# Altium PCB Firing Angle.PcbDoc
Units mil, origin at the board's own origin, x right, y up, seen from the top; angles counter-clockwise.
Board outline 2020 x 2420 mil, 2 copper layers (Top Layer, Bottom Layer); 25 components, 18 nets, 70 pads, 0 vias.
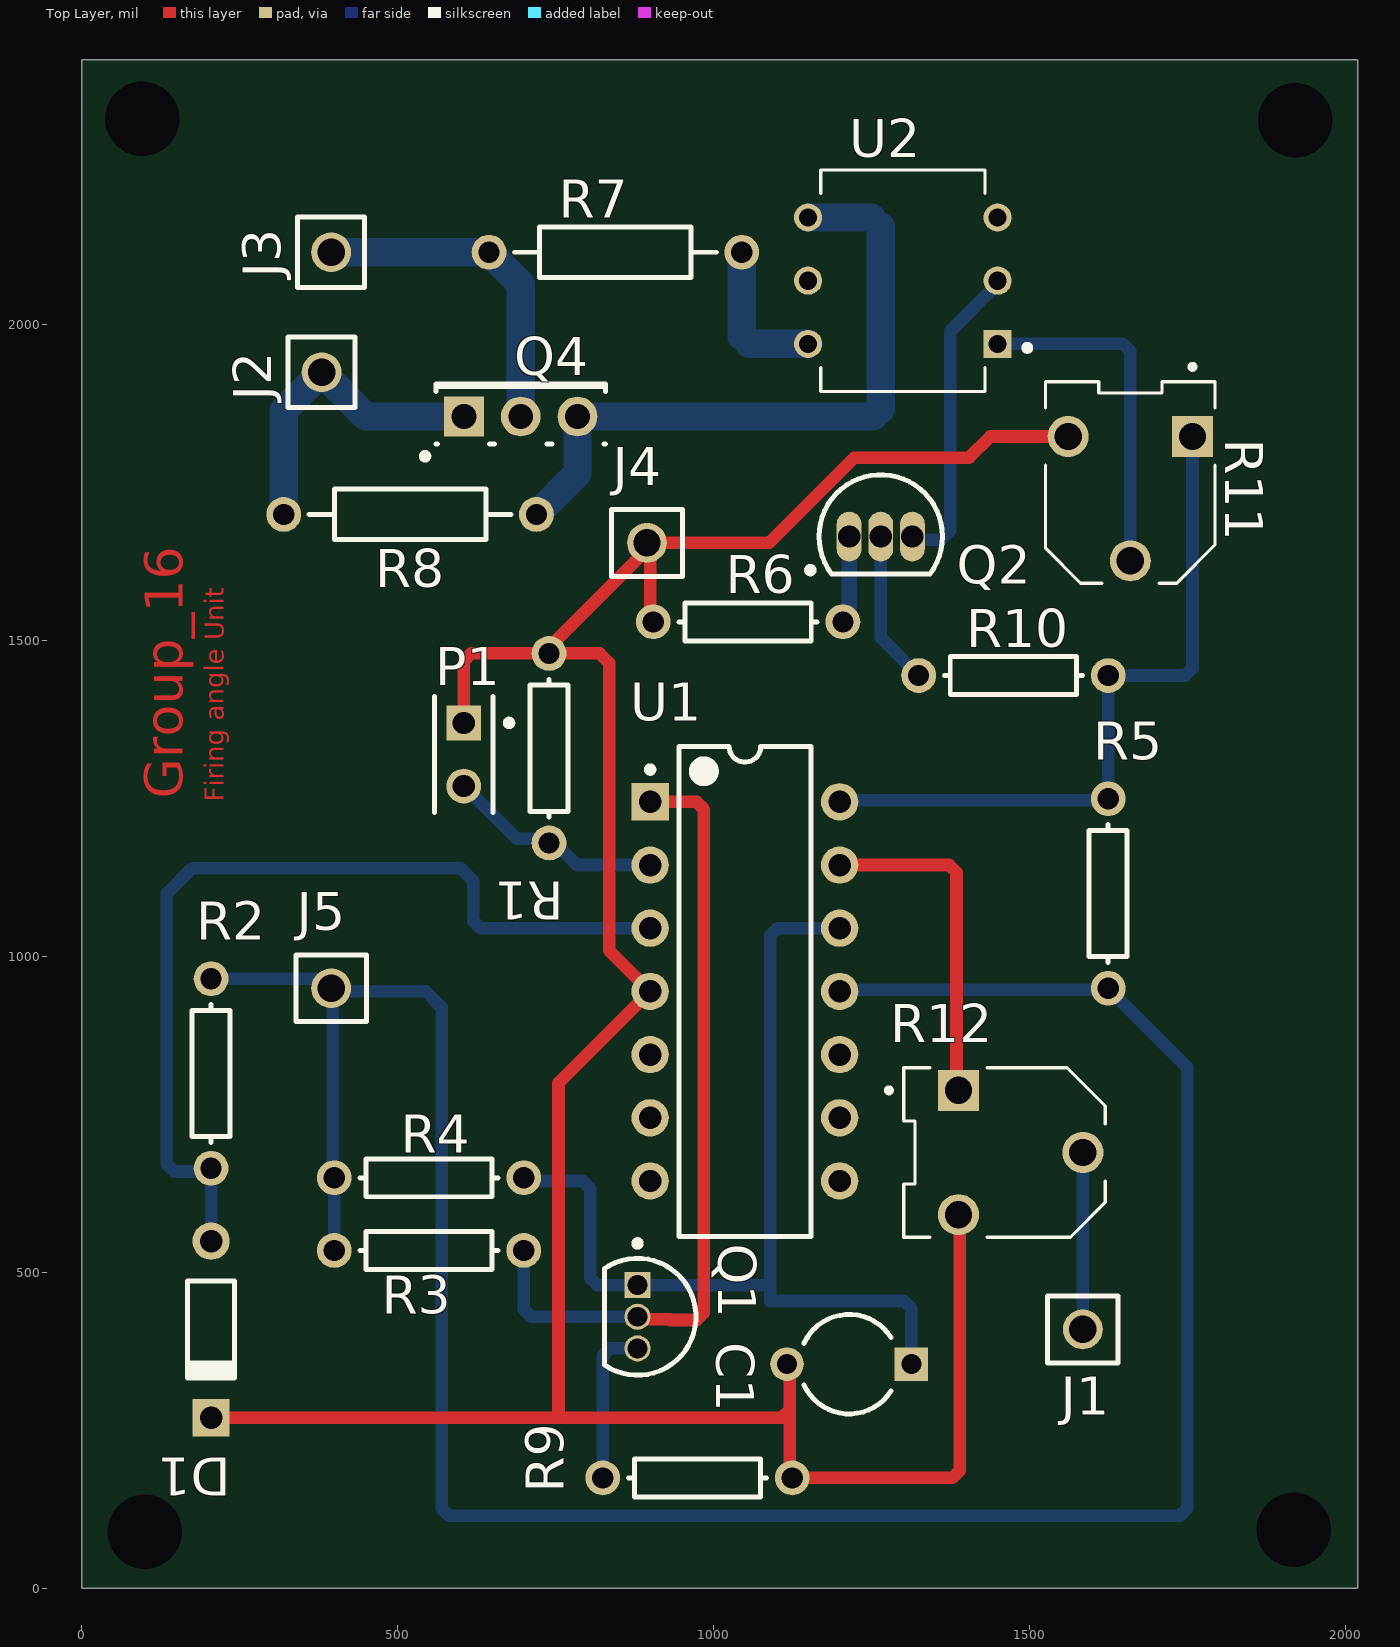
[diagram p0: Top Layer view]
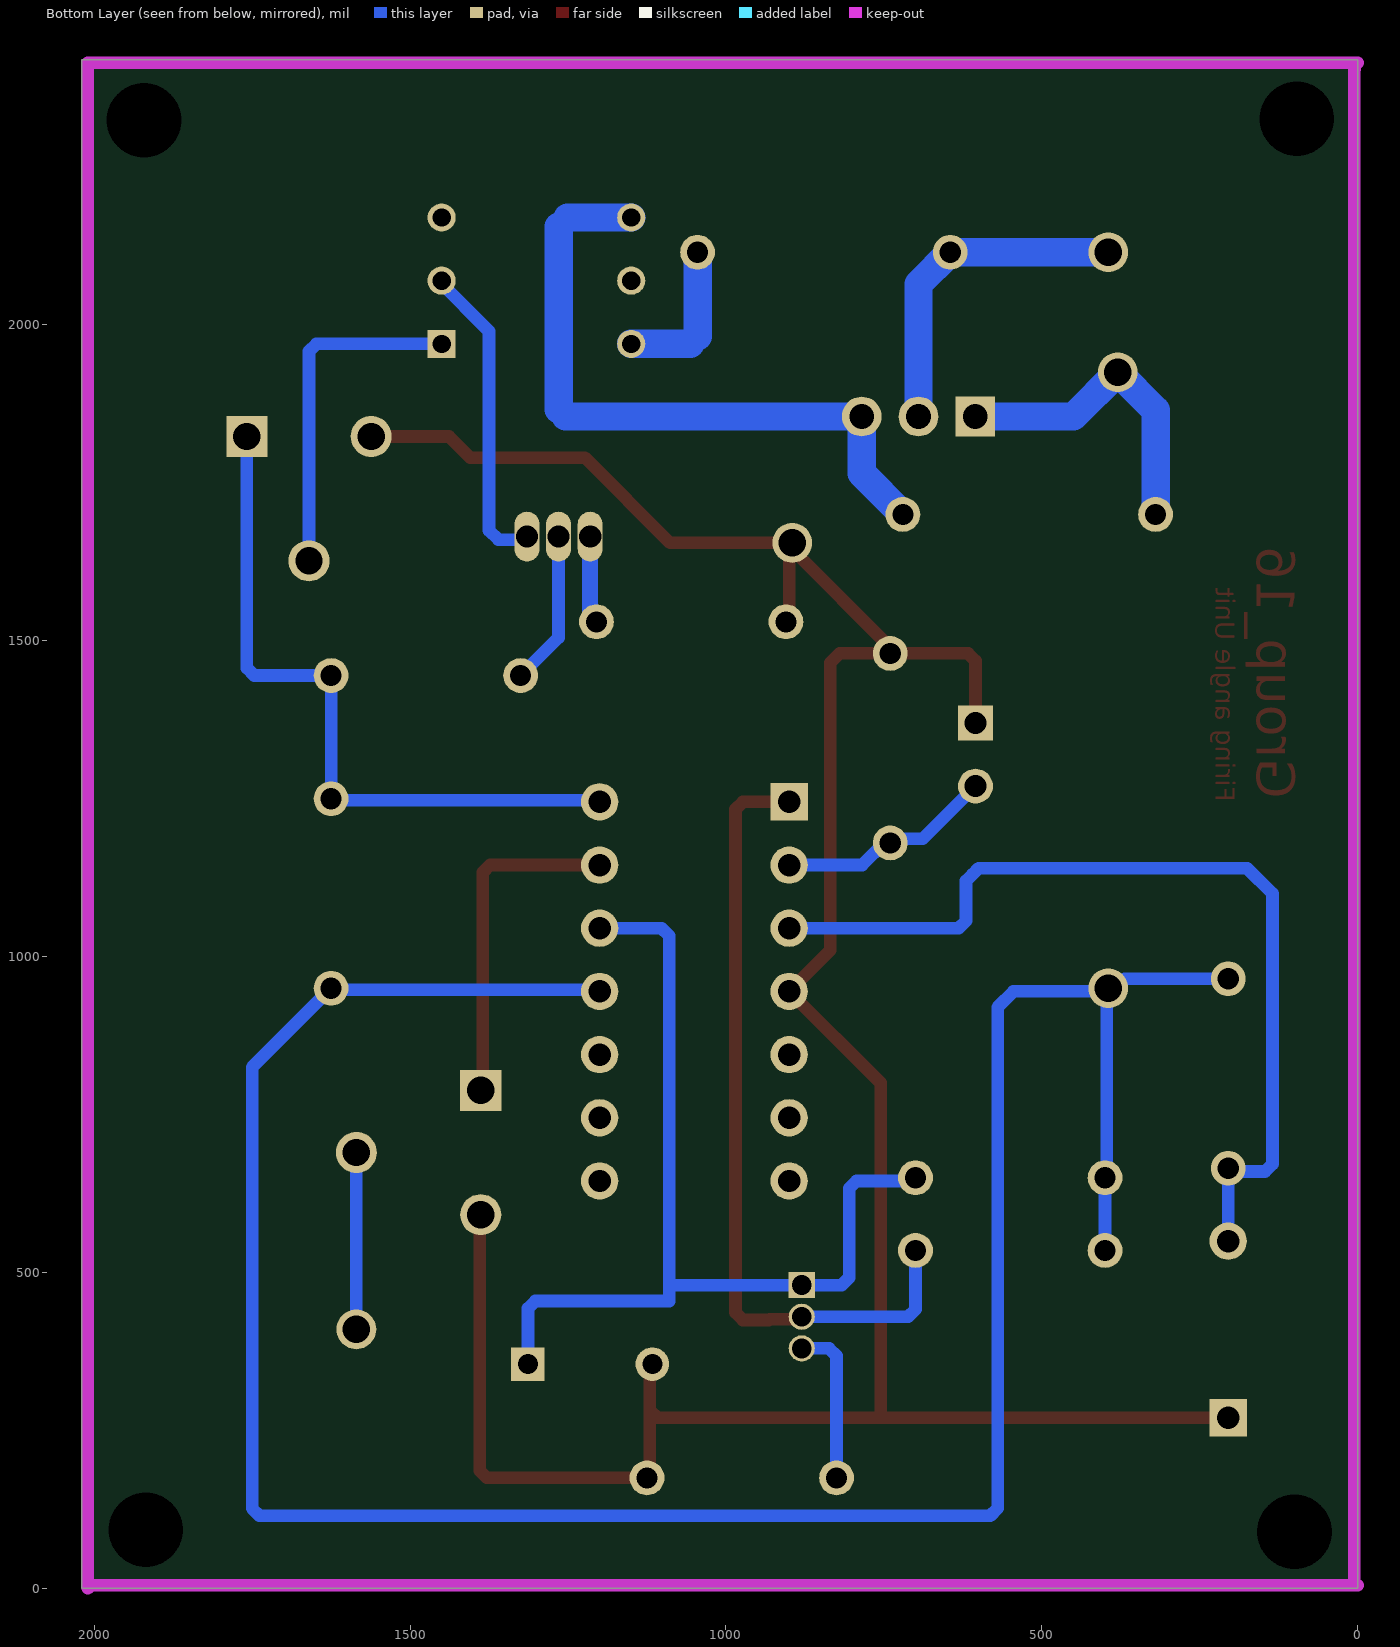
[diagram p1: Bottom Layer view, seen from below]

## Layer stack, top to bottom
Top Solder: solder mask 0.4, Solder Resist, Dk 3.5
Top Layer: signal copper 1.4
Dielectric 1: dielectric 12.6, FR-4, Dk 4.8
Bottom Layer: signal copper 1.4
Bottom Solder: solder mask 0.4, Solder Resist, Dk 3.5

## Board outline
0,0 2020,0 2020,2420 0,2420

## Design rules (kind name [scope] priority, off if disabled: settings)
Clearance [All] p1: gap=10 ignorepadtopadclearanceinfootprint=FALSE except(0: Arc-Hole Track-Hole SMDPad-Hole THPad-Hole Via-Hole Fill-Hole Poly-Hole Region-Hole Text-Hole)
PolygonConnect [All] p1: connectstyle=Relief reliefconductorwidth=10 reliefentries=4 polygonreliefangle="90 Angle" airgapwidth=10
RoutingVias [All] p1: holewidth=28 width=50 viastyle="Through Hole" minholewidth=28 minwidth=50 maxholewidth=28 maxwidth=50
SolderMaskExpansion [All] p1: expansion=4 istentingtop=FALSE
Width [All] p1: maxlimit=45 minlimit=20 preferedwidth=20 toplayer_maxwidth=20 minimp=50.000000 maximp=50.000000 favimp=50.000000
30 further rules are at their usual default settings.

## Components (designator, comment, footprint, x,y, rotation, side; value= is the part's Value field where it differs from the comment)
C1 "Cap2" CAPR5-4X5 1215,355 r180 top value=2.2nF
D1 "Diode 1N914" DO-35 205,410 r270 top
J1 "61300111121" 61300111121 1585,410 r180 top
J2 "" 61300111121 380,1925 r90 top
J3 "61300111121" 61300111121 395,2115 r90 top
J4 "61300111121" 61300111121 895,1655 r0 top
J5 "61300111121" 61300111121 395,950 r0 top
P1 "5-146280-2" TECO-5-146280-2_V 605,1320 r270 top
Q1 "BC547B" ONSC-TO-92-3-29-11 880,430 r270 top
Q2 "BC108" TO-92A 1265,1665 r270 top
Q4 "Triac" 369-03 695.24,1855 r0 top
R1 "Res1" AXIAL-0.3 740,1330 r270 top value=1K
R2 "Res1" AXIAL-0.3 205,815 r90 top value=1K
R3 "Res1" AXIAL-0.3 550,535 r180 top value=1K
R4 "Res1" AXIAL-0.3 550,650 r180 top value=3.3K
R5 "Res1" AXIAL-0.3 1625,1100 r90 top value=1K
R6 "Res1" AXIAL-0.3 1475,1445 r180 top value=1K
R7 "Res2" AXIAL-0.4 845,2115 r180 top value=0.1K
R8 "Res2" AXIAL-0.4 520,1700 r180 top value=1K
R9 "Res1" AXIAL-0.3 975,175 r180 top value=1K
R10 "Res1" AXIAL-0.3 1055,1530 r0 top value=1K
R11 "3306F-1-105" TRIM_3306F-1-105 1660,1725 r270 top
R12 "3306F-1-105" TRIM_3306F-1-105 1486.57,690 r0 top
U1 "LM324NG" ONSC-PDIP-14-646-06 1050,945 r0 top
U2 "MOC3021" DIP762W45P254L889H508Q6 1300,2070 r180 top

## Footprints (in the part's own frame and the unit in brackets; to place one, negate y for a bottom-side part, rotate by r counter-clockwise, add the part's x,y. Pads: shape width x height; smd on the part's side, far side on the other; paste and mask are expansions set on the pad)
369-03 [mm] "TO, Thru-Hole, Vertical, Heatsink Mounted; 3 In-Line Leads; Pitch 2.28 mm"
  rect 1.6x1.6 hole 1: 1(-2.28,0)
  round 1.6 hole 1: 2(0,0) 3(2.28,0)
  silkscreen extent -3.97,-1.72 3.4,1.3, body extent -3.45,-1.15 3.45,1.35, height 9.7
61300111121 [mm] "Pin Header, pitch 2.54 mm, THT, Vertical, single row, 1p"
  round 1.6 hole 1.1: 1(0,0)
  silkscreen extent -1.42,-1.35 1.42,1.35, body extent -1.27,-1.27 1.27,1.27, height 8.57
AXIAL-0.3 [mm] "Axial Device, Thru-Hole; 2 Leads; 0.3 in Pin Spacing"
  round 1.4 hole 0.85: 1(-3.81,0) 2(3.81,0)
  silkscreen extent -2.77,-0.76 2.77,0.76
AXIAL-0.4 [mm] "Axial Device, Thru-Hole; 2 Leads; 0.4 in Pin Spacing"
  round 1.4 hole 0.85: 1(-5.08,0) 2(5.08,0)
  silkscreen extent -4.06,-1.02 4.06,1.02
CAPR5-4X5 [mm] "Capacitor; 2 Leads"
  rect 1.35x1.35 hole 0.8: 1(-2.5,0)
  round 1.35 hole 0.8: 2(2.5,0)
  silkscreen extent -1.69,-2 1.82,2
DIP762W45P254L889H508Q6 [mm]
  rect 1.13x1.13 hole 0.73: 1(-3.81,2.54)
  round 1.13 hole 0.73: 2(-3.81,0) 3(-3.81,-2.54) 4(3.81,-2.54) 5(3.81,0) 6(3.81,2.54)
  silkscreen extent -5.12,-4.45 3.3,4.45
DO-35 [mm] "Diode, Axial; Body 3.8 x 1.9 mm (LxDia. max), Lead Dia. 0.53 mm (max)"
  round 1.5 hole 0.9: 1(-3.55,0)
  rect 1.5x1.5 hole 0.9: 2(3.55,0)
  silkscreen extent -1.95,-0.95 2.05,0.95
ONSC-PDIP-14-646-06 [mm] "DIP, 14-Leads, Body 19.7x7.1mm, Pitch 2.54mm"
  rect 1.5x1.5 hole 0.9: 1(-3.81,7.62)
  round 1.5 hole 0.9: 2(-3.81,5.08) 3(-3.81,2.54) 4(-3.81,0) 5(-3.81,-2.54) 6(-3.81,-5.08) 7(-3.81,-7.62) 8(3.81,-7.62) 9(3.81,-5.08) 10(3.81,-2.54) 11(3.81,0) 12(3.81,2.54) 13(3.81,5.08) 14(3.81,7.62)
  silkscreen extent -3.93,-9.85 2.65,9.85, body extent -3.95,-9.85 3.95,9.85, height 5.33
ONSC-TO-92-3-29-11 [mm] "TO, 3-Leads, Body Dia 4.7mm, Pitch 1.27mm"
  rect 1.05x1.05 hole 0.8: 1(-1.27,0)
  round 1.05 hole 0.8: 2(0,0) 3(1.27,0)
  silkscreen extent -3.07,-1.34 2.35,2.35, body extent -2.35,-1.33 2.36,2.36, height 7.87
TECO-5-146280-2_V [mm] "Connector, 2-Leads, Body 4.67x2.34mm, Pitch 2.54mm"
  rect 1.4x1.4 hole 0.89: 1(-1.27,0)
  round 1.4 hole 0.89: 2(1.27,0)
  silkscreen extent -2.33,-1.17 2.33,1.94, body extent -2.34,-1.17 2.34,1.17, height 5.33
TO-92A [mm] "TO, Flat Index; 3 In-Line, Axial Leads; Body Dia. 4.5mm; Leads 0.51 x 0.48 mm (max)"
  oval 2x1 hole 0.9: 1(0,-1.27) 2(0,0) 3(0,1.27)
  silkscreen extent -2.48,-2.95 1.5,2.48, body extent -2.48,-2.5 1.5,2.5, height 6.86
TRIM_3306F-1-105 [mm]
  rect 1.65x1.65 hole 1.1: 1(-2.5,2.5)
  round 1.65 hole 1.1: 2(2.5,0) 3(-2.5,-2.5)
  silkscreen extent -5.4,-3.4 3.4,3.4, body extent -4.7,-3.4 3.4,3.4, height 8.38

## Part data
C1: "Capacitor", PackageDescription="Capacitor; 2 Leads", PackageReference=CAPR5-4X5, Published=23-Sep-2002, Publisher="Altium Limited"
D1: "High Conductance Fast Diode", Code_JEDEC=DO-204-AH, ComponentLink1Description="Manufacturer Link", ComponentLink1URL=http://www.fairchildsemi.com/, ComponentLink2Description=Datasheet, ComponentLink2URL=http://www.fairchildsemi.com/ds/1N%2F1N4448.pdf, DatasheetVersion=1997, LatestRevisionDate=17-Jul-2002, LatestRevisionNote="Re-released for DXP Platform.", PackageDescription="Diode, Axial; Body 3.8 x 1.9 mm (LxDia. max), Lead Dia. 0.53 mm (max)", PackageReference=DO-35, Published=8-Jun-2000, Publisher="Altium Limited"
J1 J3 J4 J5: library part CMP-1502-01058-1, "THT Vertical Pin Header WR-PHD, Pitch 2.54 mm, Single Row, 1 pins", Contact Resistance=20mOhm, Manufacturer="Wurth Elektronik", Operating Temperature=-40to105degC, Rated Current=3A, Withstanding Voltage=500VAC, Working Voltage=250VAC, Datasheet URL=https://katalog.we-online.de/em/datasheet/6130xx11121.pdf, Gender=Male, Manufacturer URL=http://www.we-online.de, Mounting Technology=THT, Orientation=Vertical, Package Reference=61300111121, Packaging=Bag, Part Number=61300111121, Pin Number=1, Pitch=2.54mm, Publisher=WurthElektronik, Row Number=Single
J2: library part CMP-1502-01058-1, "THT Vertical Pin Header WR-PHD, Pitch 2.54 mm, Single Row, 1 pins", Contact Resistance=20mOhm, Manufacturer="Wurth Elektronik", Operating Temperature=-40to105degC, Package Reference=61300111121, Rated Current=3A, Withstanding Voltage=500VAC, Working Voltage=250VAC, Datasheet URL=https://katalog.we-online.de/em/datasheet/6130xx11121.pdf, Gender=Male, Manufacturer URL=http://www.we-online.de, Mounting Technology=THT, Orientation=Vertical, Packaging=Bag, Part Number=61300111121, Pin Number=1, Pitch=2.54mm, Publisher=WurthElektronik, Row Number=Single
P1: library part CMP-2000-07492-1, "Male Header, Pitch 2.54 mm, 1 x 2 Position, Height 8.21 mm, Tail Length 3.05 mm, -65 to 105 degC, RoHS, Bulk", Case\/Package=100, Colour=Black, Current Rating=3A, Flammability Rating=UL94V-0, High Temperature Housing=Yes, Manufacturer="TE Connectivity", Max Current Rating=5A, Max Operating Temperature=105degC, Min Operating Temperature=-65degC, Package Description="Male Header, Pitch 2.54 mm, 1 x 2 Position, Height 8.21 mm, Tail Length 3.05 mm", Package Quantity=500, Approvals=CSA, Board Standoff=No(Without), Connector Type=Header, Contact Gender=Male, Contact Material=CopperAlloy, Contact Mating Length=0.23inch, Contact Plating=Matte, Contact Protection=No(Without), Contact Shape=Square, Datasheet URL=http://www.te.com/commerce/DocumentDelivery/DDEController?Action=showdoc&DocId=Customer+Drawing%7F146280%7FH1%7Fpdf%7FEnglish%7FENG_CD_146280_H1.pdf%7F5-146280-2, Datasheet Version="Rev. H1, 08/2016", Depth=2.34mm, Gasket=No(Without), High Speed Serial Data Connector=No, Housing Colour=Black, Housing Material=Polymer, Keyed=No, Length=4.67mm, Manufacturer URL=http://www.te.com/, Mating Alignment=No(Without), Mating Connector Lock=No(Without), Mating Post Length=0.23inch, Mount=ThroughHole, Mounting Technology=ThroughHole, Number of Contacts=2, Number of Positions=2, Number of Rows=1, Orientation=Straight, Package Reference=5-146280-2, Packaging=Carton, Panel Mount Retention=No(Without), PCB Mount Retention=Without, PCB Mounting Orientation=Vertical, PCB Thickness=0.063inch, Pitch=2.54mm, Radiation Hardening=No, RoHSCompliant=true, Row Spacing=2.54mm, Selectively Loaded=No(Without), Stabilizers=No(Without), Termination=ThroughHole, Termination Post Length=0.12inch
Q1: library part CMP-1048-01467-1, "Amplifier Transistor, NPN Silicon, 3-Pin TO-92, Bulk Box", Manufacturer="On Semiconductor", ComponentLink1Description="Manufacturer URL", ComponentLink1URL=http://www.onsemi.com/, ComponentLink2Description=Datasheet, ComponentLink2URL=http://www.onsemi.com/pub_link/Collateral/BC546-D.PDF, ComponentLink3Description="Package Specification", ComponentLink3URL=http://www.onsemi.cn/pub_link/Collateral/2N6426-D.PDF, DatasheetVersion="Rev. 7", fT Min (MHz)=150, IC Continuous (A)=0.1, Mounting Technology="Through Hole", PackageDescription="3-Pin Transistor Outline, Body 4.825 x 3.685 mm, Pitch 1.27 mm", PackageReference=TO-92-3-29-11_AM_SL, PackageVersion="Rev. AM", Packing="Bulk Box", PartNumber=BC547B, Polarity=NPN, RoHS=FALSE
Q2: library part 2N3904, "NPN General Purpose Amplifier", ComponentLink1Description="Manufacturer Link", ComponentLink1URL=http://www.fairchildsemi.com/, ComponentLink2Description=Datasheet, ComponentLink2URL=http://www.fairchildsemi.com/ds/2N%2F2N3904.pdf, DatasheetVersion=1997, LatestRevisionDate=15-Jan-2003, LatestRevisionNote="PCB Footprint 'BCY-W3/D4.7' replaced", PackageDescription="TO, Flat Index; 3 In-Line, Axial Leads; Body Dia. 4.5mm; Leads 0.51 x 0.48 mm (max)", PackageReference=TO-92A, PackageVersion=Sep-1998, Published=8-Jun-2000, Publisher="Altium Limited"
Q4: "Silicon Bidirectional Triode Thyristor", ComponentLink1Description="Manufacturer Link", ComponentLink1URL=http://www.motorola.com/, DatasheetVersion=1999, LatestRevisionDate=17-Jul-2002, LatestRevisionNote="Re-released for DXP Platform.", Note="Pin 2 is electrically connected to Pin 4 (TAB)", PackageDescription="TO, Thru-Hole, Vertical, Heatsink Mounted; 3 In-Line Leads; Pitch 2.28 mm", PackageReference=369-03, Published=29-Sep-2000, Publisher="Altium Limited"
R1 R2 R3 R4 R5 R6 R7 R8 R9 R10: "Resistor", LatestRevisionDate=17-Jul-2002, LatestRevisionNote="Re-released for DXP Platform.", Published=8-Jun-2000, Publisher="Altium Limited"
  R1 R2 R3 R4 R5 R6 R9 R10: PackageDescription="Axial Device, Thru-Hole; 2 Leads; 0.3 in Pin Spacing", PackageReference=AXIAL-0.3
  R7 R8: PackageDescription="Axial Device, Thru-Hole; 2 Leads; 0.4 in Pin Spacing", PackageReference=AXIAL-0.4
R11 R12: "1 MOhms 0.2W, 1/5W PC Pins Through Hole Trimmer Potentiometer Cermet 1 Turn Top Adjustment", Package="3306F Bourns", Availability=Good, Check_prices=https://www.snapeda.com/parts/3306F-1-105/Bourns%20-%20J.W.%20Miller/view-part/862876/?ref=eda, MF=Bourns, MP=3306F-1-105, Price=None, Purchase-URL=https://pricing.snapeda.com/search/part/3306F-1-105/?ref=eda, SnapEDA_Link=https://www.snapeda.com/parts/3306F-1-105/Bourns%20-%20J.W.%20Miller/view-part/862876/?ref=snap
U1: library part CMP-1310-00027-1, "Single Supply Quad Operational Amplifier, 3 to 32 V, 0 to 70 degC, 14-Pin PDIP, Pb-Free, Tube", Manufacturer="On Semiconductor", ComponentLink1Description="Manufacturer URL", ComponentLink1URL=http://www.onsemi.com/, ComponentLink2Description=Datasheet, ComponentLink2URL=http://www.onsemi.cn/pub_link/Collateral/LM324-D.PDF, ComponentLink3Description="Package Specification", ComponentLink3URL=http://www.onsemi.com/pub_link/Collateral/646-06.PDF, DatasheetVersion="Rev. 25", Mounting Technology="Through Hole", PackageDescription="14-Pin Plastic Dual-In Line Package, Body 19.18 x 6.605 mm, Pitch 2.54 mm", PackageReference=PDIP-14-646-06, PackageVersion="Rev. R, 06/2013", Packing=Tube, PartNumber=LM324NG, RoHS=TRUE, VCC Max (V)=32, VCC Min (V)=3
U2: "Optoisolator Triac Output 5000Vrms 1 Channel 6-DIP", Package="DIP-6 Lite-On", Availability=Unavailable, MF=Lite-On, MP=MOC3021, Price=None, SnapEDA_Link=https://www.snapeda.com/parts/MOC3021/Lite-On/view-part/4551083/?ref=snap

## Free pads (board coordinates)
  round 60 hole 118.11: 6(96.3,2326.58) 6(100,90) 6(1918.7,92.9) 6(1921.09,2324.09)

## Nets (pads, with @x,y where several pads share a name; then routed paths per layer and width w, separated by ;. In a path a pad name is that pad's centre, name@x,y a point inside that pad or via, vN(x,y) a via of type N, cw(c..) or ccw(c..) an arc to the next point about the centre after c; other vN are vias at no path point)
+12: J5.1 R2.2 R3.2 R4.2 R5.1 U1.11 | length 4082.3
  Bottom Layer w20: R2.2 368.37,965 383.37,950 J5.1 J5.1@397.5,947.5 ; R3.2 R4.2 397.5,652.5 J5.1@397.5,947.5 ; U1.11 1202.5,947.5 1622.5,947.5 R5.1 1750,825 1750,126.72 1738.28,115 581.72,115 570,126.72 570,920 545,945 400,945 J5.1@397.5,947.5
GND: C1.2 D1.2 J4.1 P1.1 R1.1 R9.1 R10.1 R11.3 R12.3 U1.4 | length 4516.1
  Top Layer w20: D1.2 755,270.24 ; P1.1 605,1468.28 616.72,1480 R1.1 ; R10.1 900,1535 900,1650 J4.1 ; C1.2 1120.79,350.79 1120.79,179.21 R9.1 1378.28,175 1390,186.72 1390,589.72 R12.3 ; 1120,281.95 1108.28,270.24 755,270.24 ; R11.3@1561.57,1811.92 R11.3 1438.43,1823.43 1405,1790 1223.32,1790 1088.32,1655 J4.1 ; R1.1 740,1489.5 895,1644.5 J4.1 ; R1.1 820,1480 835,1465 835,1010 U1.4 755,800 755,270.24
NetC1_1: C1.1 Q1.1 R4.1 U1.12 | length 1562.5
  Bottom Layer w20: R4.1@709.5,650 R4.1 705,645 793.28,645 805,633.28 805,491.72 816.72,480 Q1.1 1090,480 ; U1.12 1101.72,1045 1090,1033.28 1090,480 ; C1.1 1313.43,443.28 1301.71,455 1090,455 1090,480
NetD1_1: D1.1 R2.1 U1.3 | length 1478.4
  Bottom Layer w20: D1.1 R2.1 200,660 146.72,660 135,671.72 135,1100 175,1140 600,1140 609.97,1130.03 620,1120 620,1056.72 631.72,1045 U1.3
NetJ1_1: J1.1 R12.2 | length 280
  Bottom Layer w20: J1.1 R12.2
NetJ2_1: J2.1 Q4.1 R8.2 | length 504.3
  Bottom Layer w45: R8.2 320,1865 J2.1 450,1855 Q4.1
NetJ3_1: J3.1 Q4.2 R7.2 | length 531.1
  Bottom Layer w25: Q4.2@695,1855.24 Q4.2
  Bottom Layer w45: J3.1 R7.2 695.24,2064.76 Q4.2
NetP1_2: P1.2 R1.2 U1.2 | length 346.8
  Bottom Layer w20: P1.2 688.28,1186.72 733.28,1186.72 R1.2 749.5,1180 784.5,1145 U1.2
NetQ1_2: Q1.2 R3.1 U1.1 | length 1276.5
  Top Layer w20: Q1.2 883.64,426.36 930.67,426.36 932.03,425 973.28,425 985,436.72 985,1233.28 973.28,1245 U1.1
  Bottom Layer w20: R3.1 700,441.72 711.72,430 Q1.2
NetQ1_3: Q1.3 R9.2 | length 253.1
  Bottom Layer w20: R9.2 825,368.28 836.72,380 Q1.3
NetQ2_1: Q2.1 R10.2 | length 139.1
  Bottom Layer w25: R10.2 1205,1538.15 1215,1548.15 Q2.1
NetQ2_2: Q2.2 R6.2 | length 244.9
  Bottom Layer w20: Q2.2 1265,1505 R6.2
NetQ2_3: Q2.3 U2.2 | length 496.6
  Bottom Layer w20: Q2.3@1320,1660 1360.36,1660 1375,1674.64 1375,1990 U2.2@1455,2070
  Bottom Layer w25: Q2.3 Q2.3@1320,1660
NetQ4_3: Q4.3 R8.1 U2.4 | length 1076.5
  Bottom Layer w25: 1250.36,2170 1265,2155.36 ; 1253.28,1855 1265,1866.72
  Bottom Layer w45: R8.1 785,1765 Q4.3 1253.28,1855 ; U2.4 1250.36,2170 ; 1265,1866.72 1265,2155.36
NetR5_2: R5.2 R6.1 R11.1 U1.14 | length 1127.1
  Bottom Layer w20: U1.14 1202.5,1247.5 1622.5,1247.5 R5.2 R6.1 1746.71,1445 1758.43,1456.72 R11.1
NetR7_1: R7.1 U2.6 | length 243.1
  Bottom Layer w20: 1045,1981.72 1056.72,1970
  Bottom Layer w45: 1045,1981.72 R7.1 ; 1056.72,1970 U2.6
NetR11_2: R11.2 U2.1 | length 541.6
  Bottom Layer w20: U2.1@1455,1970 1648.28,1970 1660,1958.28 R11.2
NetR12_1: R12.1 U1.13 | length 536
  Top Layer w20: U1.13 1373.28,1145 1385,1133.28 1385,791.57 R12.1
pads on no net: U1.5 U1.6 U1.7 U1.8 U1.9 U1.10 U2.3 U2.5

## Keep-outs
Bottom Layer:
  lines w19.68: 0,5 2005,5 2010,0 2010,2415 0,2415 ; 5,10 5.49,10.49 5.49,2404.51 5,2405

## Other copper
Top Layer:
  text "Group_16" at 160.01,1250 h60 r90
  text "Firing angle Unit" at 225,1245.08 h30 r90